# EAGLE board SNES_RGBAmp_wCSYNC (EAGLE 7.6.0)
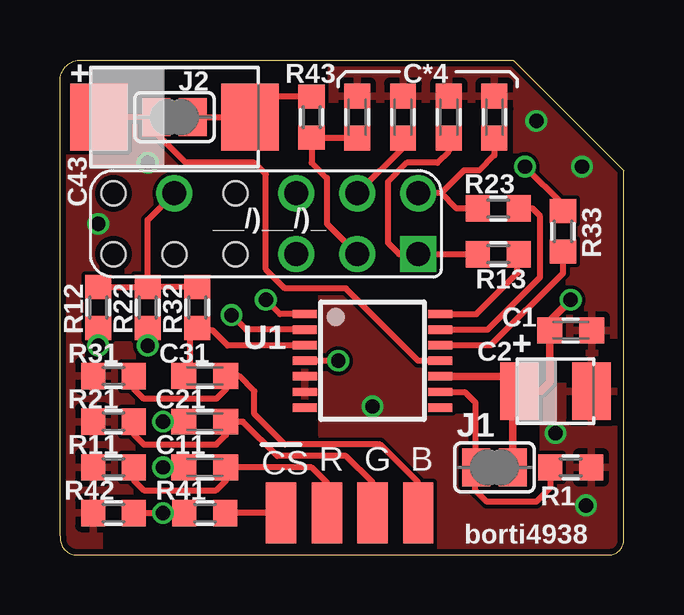
[diagram p0: board, top side]
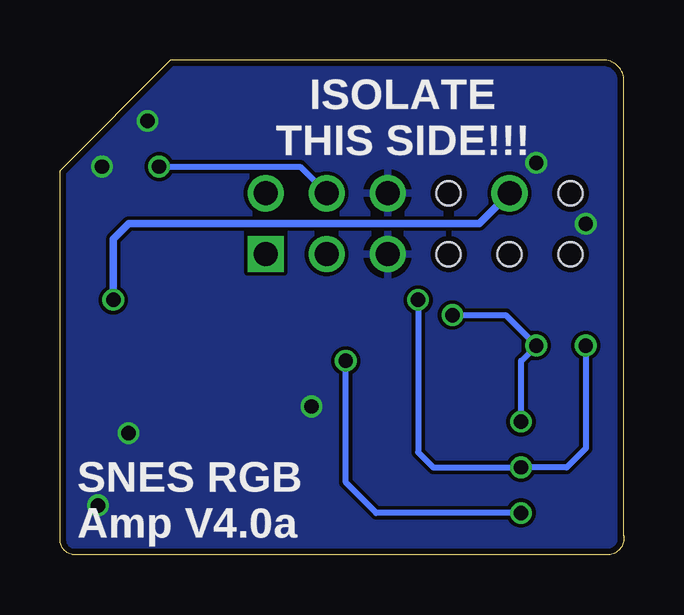
[diagram p1: board, bottom side, seen from below]

Size 23.5 x 20.64 mm. Coordinates in mm from the lower left corner, seen from the top.
Outline: 0,0.79 arc90 0.64,0 22.86,0 arc90 23.5,0.64 23.5,16.03 18.9,20.64 0.96,20.64 arc90 0,19.84 0,0.79
Copper layers (1*16): Top 0.035mm / dielectric 1.5mm / Bottom 0.035mm
Design rules "ITEADstudio_DRC": minimum track width 6mil, minimum drill 12mil, track to track 6mil, track to pad 6mil, pad to pad 6mil, via to via 6mil, smd to smd 0mil, copper to edge 10mil, drill to drill 10mil, minimum pad ring 10mil, minimum via ring 6mil, stop-mask expansion 2mil, vias tented up to drill 30mil, thermal gap 10mil
tRestrict: area 8.7,11.3 to 11.8,18.7; area 11.8,16.8 to 18.7,18.7; area 20.5,12.9 to 21.4,14; area 20.5,7.3 to 21.8,8.9; area 1.9,0.2 to 8.4,2.4; area 1.1,9 to 5.9,11.6; area 7.1,4.9 to 9.7,8.7; area 9.7,4.9 to 10.6,5.9; area 22.5,7.9 to 23.5,8.9; area 18.9,4.1 to 19.8,5.6; area 9.2,10 to 10.6,11; area 9.6,19.4 to 11,20.3; 1 more areas

## Footprints (pad centres in the part's own frame; a part is rotated, then mirrored left to right if it is on the bottom)
SMD1,27-2,54 = smd 1.27 x 2.54: 1 0,0
C0603K = smd 1.05 x 1.08: 1 -0.875,0; 2 0.875,0
SMC_B = smd 1.6 x 2.4: + -1.5,0; - 1.5,0
SMC_D = smd 2.4 x 2.8: + -3.15,0; - 3.15,0
SJ = smd 1.168 x 1.6: 1 -0.762,0; 2 0.762,0
SNES_MULTIAV_RGBC_ONLY = drill 1 square: P$1 6.35,-1.27 | drill 1: P$2 6.35,1.27; P$3 3.81,-1.27; P$4 3.81,1.27; P$5 1.27,-1.27; P$6 1.27,1.27; P$10 -3.81,1.27 | hole 1: -1.27,-1.27; -1.27,1.27; -3.81,-1.27; -6.35,-1.27; -6.35,1.27
R0603 = smd 1 x 1.1: 1 -0.85,0; 2 0.85,0
THS7374 = smd 0.35 x 1: 1 -1.95,-2.825; 2 -1.3,-2.825; 3 -0.65,-2.825; 4 0,-2.825; 5 0.65,-2.825; 6 1.3,-2.825; 7 1.95,-2.825; 8 1.95,2.825; 9 1.3,2.825; 10 0.65,2.825; 11 0,2.825; 12 -0.65,2.825; 13 -1.3,2.825; 14 -1.95,2.825

## Placement (x,y rotation side)
B  [SMD1,27-2,54]  14.93,1.75 0 top
C1  0.1u  [C0603K]  21.28,9.37 0 top
C2  22u  [SMC_B]  20.64,6.83 0 top
C11  82n  [C0603K]  6.04,3.65 180 top
C14  47p  [C0603K]  16.2,18.26 90 top
C21  82n  [C0603K]  6.04,5.56 180 top
C24  47p  [C0603K]  18.1,18.26 90 top
C31  82n  [C0603K]  6.04,7.46 180 top
C34  47p  [C0603K]  14.29,18.26 90 top
C43  330u  [SMC_D]  4.77,18.26 0 top
C44  47p  [C0603K]  12.39,18.26 90 top
CS  [SMD1,27-2,54]  9.21,1.75 0 top
G  [SMD1,27-2,54]  13.02,1.75 0 top
J1  [SJ]  18.1,3.65 180 top
J2  [SJ]  4.77,18.26 0 top
J3  SNES_MULTIAV_RGBC_ONLY  [SNES_MULTIAV_RGBC_ONLY]  8.58,13.81 0 top
R  [SMD1,27-2,54]  11.12,1.75 0 top
R1  10k  [R0603]  21.28,3.65 0 top
R11  [R0603]  2.23,3.65 0 top
R12  3M6  [R0603]  1.59,10.32 90 top
R13  [R0603]  18.26,12.54 0 top
R21  [R0603]  2.23,5.56 0 top
R22  3M6  [R0603]  3.66,10.32 90 top
R23  [R0603]  18.26,14.45 0 top
R31  [R0603]  2.23,7.46 0 top
R32  3M6  [R0603]  5.72,10.32 90 top
R33  [R0603]  20.96,13.49 270 top
R41  8k66  [R0603]  6.04,1.75 0 top
R42  1k4  [R0603]  2.23,1.75 180 top
R43  [R0603]  10.48,18.26 90 top
U1  THS7374  [THS7374]  13.02,8.1 270 top

## Library data of the parts
B CS G R = wirepad
C1 C2 C11 C14 C21 C24 C31 C34 C43 C44 R1 R11-R13 R21-R23 R31-R33 R41-R43 = rcl
J1 J2 = jumper
J3 U1 = snes_div

## Nets
GND: C1.2 C2.- C14.2 C24.2 C34.2 C44.2 J3.P$5 J3.P$6 R1.2 R11.1 R21.1 R31.1 R42.2 U1.5 U1.6
N$1: C11.2 R12.1 U1.1
N$2: C21.2 R22.1 U1.2
N$3: J1.2 R1.1 U1.9
N$5: C14.1 J3.P$1 R13.1
N$6: C24.1 J3.P$2 R23.1
N$8: R33.2 U1.12
N$9: C34.1 J3.P$4 R33.1
N$10: R41.1 R42.1 U1.4
N$12: R13.2 U1.14
N$13: R23.2 U1.13
N$14: C11.1 R11.2 R.1
N$15: C21.1 G.1 R21.2
N$16: B.1 C31.1 R31.2
N$17: CS.1 R41.2
N$18: C43.+ J2.1 U1.11
N$19: C43.- J2.2 R43.2
N$20: C44.1 J3.P$3 R43.1
R9: C31.2 R32.1 U1.3
VCC: C1.1 C2.+ J1.1 J3.P$10 R12.2 R22.2 R32.2 U1.10

## Tracks (layer width: path | path; a pad name or v marks a point on that pad's centre or on a via)
GND  (via drill 0.6)
  other vias: 13.02,6.19 1.59,13.81 21.91,2.06 19.85,18.1 3.66,16.35 21.75,16.19 20.64,5.08
  pour Bottom: -0.95,-0.16 24.45,-0.16 24.45,21.43 -0.95,21.43
  pour Top: -0.95,-0.16 24.45,-0.16 24.45,21.43 -0.95,21.43
N$1  (via drill 0.6)
  Top 0.254: U1.1 9.17,10.05 v8.58,10.64 | v4.29,3.65 C11.2 | R12.1 v1.59,8.73
  Bottom 0.254: v8.58,10.64 8.58,4.29 7.94,3.65 v4.29,3.65 2.39,3.65 1.59,4.45 v1.59,8.73
N$2  (via drill 0.6)
  Top 0.254: C21.2 v4.29,5.56 | v3.66,8.73 R22.1 | U1.2 7.75,9.4 v7.15,10
  Bottom 0.254: v4.29,5.56 4.29,8.1 v3.66,8.73 4.93,10 v7.15,10
N$3
  Top 0.254: R1.1 20.43,2.8 19.85,2.22 17.78,2.22 17.31,2.7 17.31,3.62 J1.2 17.31,3.68 17.31,6.35 16.86,6.8 U1.9
N$5
  Top 0.254: C14.1 16.2,16.83 15.72,16.35 14.45,16.35 13.66,15.56 13.66,13.02 14.13,12.54 J3.P$1 R13.1
N$6
  Top 0.254: C24.1 18.1,16.67 17.47,16.03 16.83,16.03 15.88,15.08 | 15.88,15.08 J3.P$2 | R23.1 16.51,14.45 15.88,15.08
N$8
  Top 0.254: U1.12 17.96,8.75 20.96,11.75 R33.2
N$9  (via drill 0.6)
  Top 0.254: C34.1 14.29,16.99 J3.P$4 | v19.37,16.19 20.96,14.61 R33.1
  Bottom 0.254: v19.37,16.19 13.5,16.19 J3.P$4
N$10  (via drill 0.6)
  Top 0.254: R41.1 v4.29,1.75 R42.1 | v11.59,8.1 U1.4
  Bottom 0.254: v4.29,1.75 10.32,1.75 11.59,3.02 v11.59,8.1
N$12
  Top 0.254: U1.14 17.35,10.05 19.05,11.75 19.05,12.33 R13.2
N$13
  Top 0.254: U1.13 17.81,9.4 20.01,11.59 20.01,14.13 19.69,14.45 R23.2 19.21,14.34
N$14
  Top 0.254: R.1 11.12,3.02 10.48,3.65 C11.1 6.91,3.1 6.51,2.7 3.5,2.7 3.08,3.12 R11.2
N$15
  Top 0.254: G.1 13.02,3.02 11.91,4.13 9.05,4.13 7.62,5.56 C21.1 6.91,5 6.51,4.6 3.5,4.6 3.08,5.02 R21.2
N$16
  Top 0.254: B.1 14.93,3.02 13.34,4.6 9.37,4.6 8.1,5.87 8.1,6.83 7.47,7.46 C31.1 6.91,6.91 6.51,6.51 3.5,6.51 3.08,6.93 R31.2
N$17
  Top 0.254: CS.1 R41.2
N$18
  Top 0.254: C43.+ J2.1 3.97,18.22 4.13,17.46 5.24,16.35 8.1,16.35 8.58,15.88 8.58,11.91 9.37,11.11 11.91,11.11 14.93,8.1 U1.11
N$19
  Top 0.254: R43.2 8.77,19.11 C43.- J2.2
N$20
  Top 0.254: J3.P$3 11.12,13.81 11.12,15.72 10.48,16.35 R43.1 10.51,17.38 C44.1
R9
  Top 0.254: U1.3 10.18,8.73 6.99,8.73 6.35,9.37 5.82,9.37 R32.1 5.46,9.47 5.4,9.53 5.4,7.7 C31.2
VCC  (via drill 0.6)
  Top 0.254: R12.2 R22.2 | R32.2 R22.2 | R22.2 3.66,13.97 J3.P$10
  Top 0.305: v21.28,10.64 20.48,9.84 20.48,9.45 C1.1 20.4,7.22 20.01,6.83 C2.+ | U1.10 18.52,7.45 C2.+ | J1.1 18.86,6.55 C2.+
  Bottom 0.305: J3.P$10 6.04,13.81 20.64,13.81 21.28,13.18 v21.28,10.64

## Text on the board
tPlace: J2 | __/)__/)_ | U1 | J1 | borti4938
tNames: + | R43 | C*4 | C43 | R23 | R33 | R13 | C1 | R12 | R22 | R32 | R31 | C31 | C2 | + | R21 | C21 | R11 | C11 | R42 | R41 | R1
bNames: ISOLATE / THIS SIDE!!! | SNES RGB / Amp V4.0a